# EAGLE board cansat (EAGLE 8.0.2)
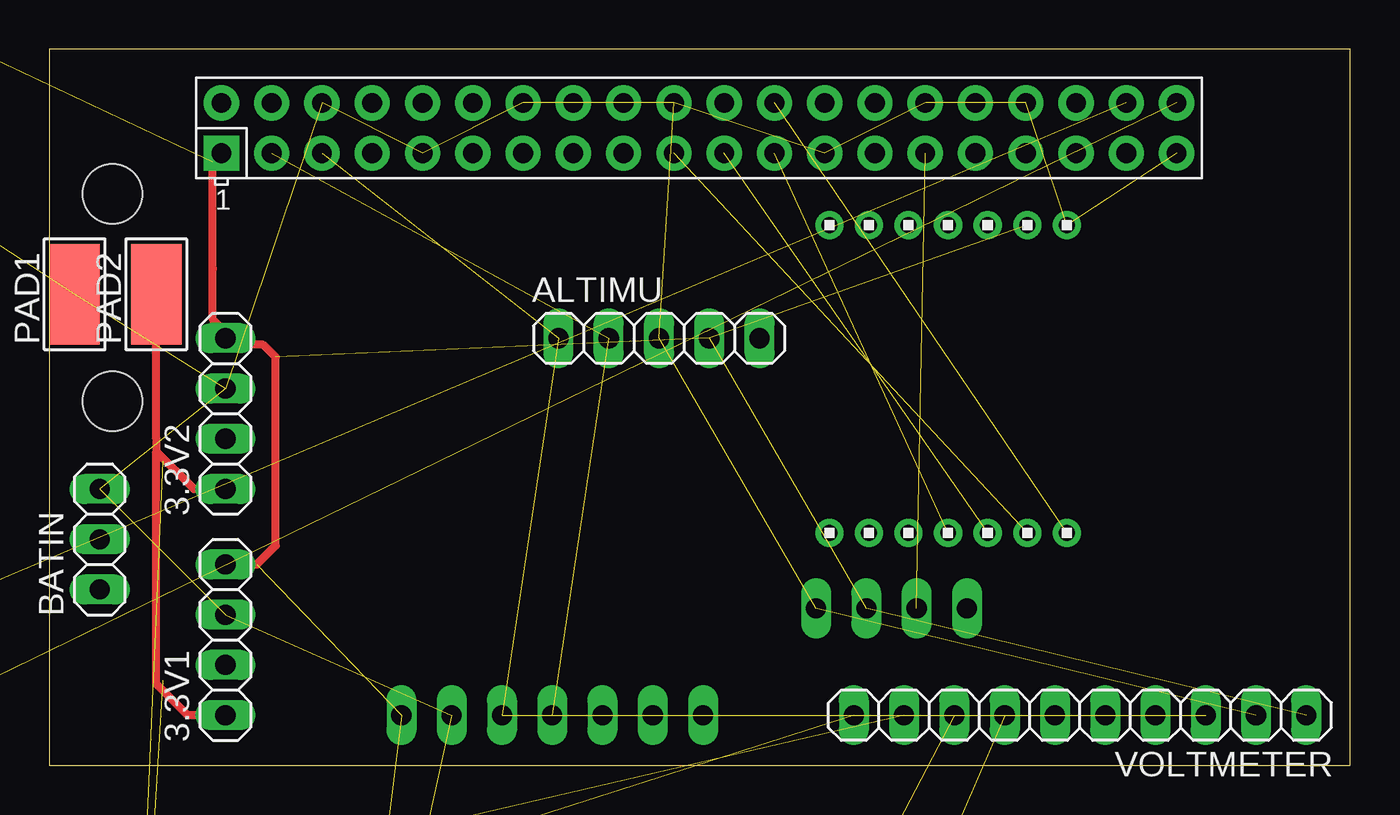
[diagram p0: board, top side]
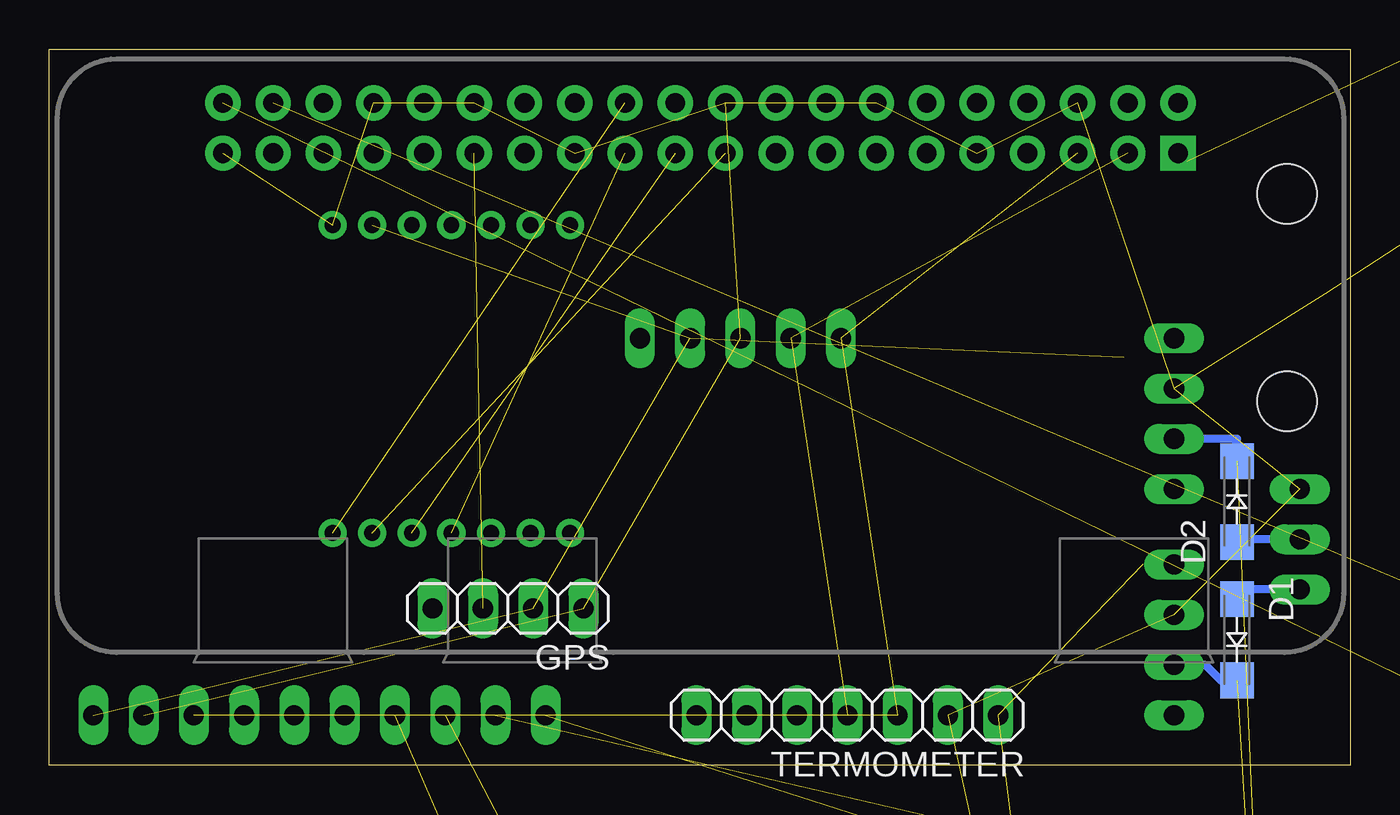
[diagram p1: board, bottom side, seen from below]

Size 65.71 x 36.19 mm. Coordinates in mm from the lower left corner, seen from the top.
Outline: 0,0 65.71,0 65.71,36.19 0,36.19 0,0
Copper layers (1*16): Top 0.035mm / dielectric 1.5mm / Bottom 0.035mm
Design rules "default": minimum track width 10mil, minimum drill 24mil, track to track 8mil, track to pad 8mil, pad to pad 8mil, via to via 8mil, smd to smd 8mil, copper to edge 40mil, drill to drill 8mil, minimum pad ring 10mil, minimum via ring 8mil, stop-mask expansion 4mil, vias tented up to drill 0mil, thermal gap 10mil
Holes 3 mm at 3.17,18.41 3.17,28.89

## Footprints (pad centres in the part's own frame; a part is rotated, then mirrored left to right if it is on the bottom)
1X04 = drill 1.016 long: 1 -3.81,0; 2 -1.27,0; 3 1.27,0; 4 3.81,0
1X05 = drill 1.016 long: 1 -5.08,0; 2 -2.54,0; 3 0,0; 4 2.54,0; 5 5.08,0
1X03 = drill 1.016 long: 1 -2.54,0; 2 0,0; 3 2.54,0
C1206 = smd 1.6 x 1.8: 1 -1.4,0; 2 1.4,0
SMA-DO214AC = smd 1.8 x 1.7: A -2.05,0; K 2.05,0
5-2,5 = smd 2.54 x 5.08: 1 0,0
R1206 = smd 1.6 x 1.803: 1 -1.422,0; 2 1.422,0
1X7 = drill 0.8 pad 1.422: 1 -6,0; 2 -4,0; 3 -2,0; 4 0,0; 5 2,0; 6 4,0; 7 6,0
RASPBERRYPI_BASTELSTUBE_V13_RASPI_BOARD_B+_FULL = drill 1 pad 1.778 square: 1 8.37,25.23 | drill 1 pad 1.778: 2 8.37,27.77; 3 10.91,25.23; 4 10.91,27.77; 5 13.45,25.23; 6 13.45,27.77; 7 15.99,25.23; 8 15.99,27.77; 9 18.53,25.23; 10 18.53,27.77; 11 21.07,25.23; 12 21.07,27.77; 13 23.61,25.23; 14 23.61,27.77; 15 26.15,25.23; 16 26.15,27.77; 17 28.69,25.23; 18 28.69,27.77; 19 31.23,25.23; 20 31.23,27.77; 21 33.77,25.23; 22 33.77,27.77; 23 36.31,25.23; 24 36.31,27.77; 25 38.85,25.23; 26 38.85,27.77; 27 41.39,25.23; 28 41.39,27.77; 29 43.93,25.23; 30 43.93,27.77; 31 46.47,25.23; 32 46.47,27.77; 33 49.01,25.23; 34 49.01,27.77; 35 51.55,25.23; 36 51.55,27.77; 37 54.09,25.23; 38 54.09,27.77; 39 56.63,25.23; 40 56.63,27.77
SJ_2W = smd 1.27 x 2.54: 1 -2.54,0; 2 0,0; 3 2.54,0
1X07 = drill 1.016 long: 1 -7.62,0; 2 -5.08,0; 3 -2.54,0; 4 0,0; 5 2.54,0; 6 5.08,0; 7 7.62,0
1X10 = drill 1.016 long: 1 -11.43,0; 2 -8.89,0; 3 -6.35,0; 4 -3.81,0; 5 -1.27,0; 6 1.27,0; 7 3.81,0; 8 6.35,0; 9 8.89,0; 10 11.43,0

## Placement (x,y rotation side)
3.3V1  [1X04]  8.89,6.35 90 top
3.3V2  [1X04]  8.89,17.78 90 top
ALTIMU  [1X05]  30.8,21.59 0 top
BATIN  [1X03]  2.54,11.43 90 top
C1  [C1206]  -1.4,-140.97 0 top  (outside the outline)
C2  [C1206]  -1.4,-204.47 0 top  (outside the outline)
C3  [C1206]  -1.4,-191.77 0 top  (outside the outline)
C4  [C1206]  -1.4,-179.07 0 top  (outside the outline)
C5  [C1206]  -1.4,-166.37 0 top  (outside the outline)
C6  [C1206]  -1.4,-153.67 0 top  (outside the outline)
D1  GF1  [SMA-DO214AC]  5.71,6.35 270 bottom
D2  GF1  [SMA-DO214AC]  5.71,13.34 90 bottom
ENCODER  [1X04]  -30.48,46.99 0 top  (outside the outline)
GPS  [1X04]  42.55,7.94 180 bottom
PAD1  [5-2,5]  1.27,23.81 0 top
PAD2  [5-2,5]  5.4,23.81 0 top
R1  10k  [R1206]  -1.42,-90.17 0 top  (outside the outline)
R2  10k  [R1206]  -1.42,-102.87 0 top  (outside the outline)
R3  10k  [R1206]  -1.42,-115.57 0 top  (outside the outline)
R4  10k  [R1206]  -1.42,-128.27 0 top  (outside the outline)
RADIOL  1X7  [1X7]  45.4,11.75 180 top
RADIOR  1X7  [1X7]  45.4,27.3 180 top
RASPIZERO  RPI-ZERO  [RASPBERRYPI_BASTELSTUBE_V13_RASPI_BOARD_B+_FULL]  0.32,5.71 0 top
SJ1  [SJ_2W]  -85.09,-26.67 0 top  (outside the outline)
SJ2  [SJ_2W]  -85.09,-36.83 0 top  (outside the outline)
TERMOMETER  [1X07]  25.4,2.54 180 bottom
VOLTMETER  [1X10]  52.07,2.54 180 top

## Library data of the parts
3.3V1 3.3V2 ALTIMU BATIN ENCODER GPS TERMOMETER VOLTMETER = pinhead
C1-C6 = eagle-ltspice; SPICEMODEL: NONE; SPICEPREFIX: C
D1 D2 = diode
PAD1 PAD2 = wirepad
R1-R4 = eagle-ltspice; SPICEMODEL: NONE; SPICEPREFIX: R
RADIOL RADIOR = headers(2mm)
RASPIZERO = RPI-Zero
SJ1 SJ2 = jumper

## Nets
3.3V: 3.3V1.4 3.3V2.4 ALTIMU.4 C1.2 C2.2 C3.2 C4.1 C5.2 C6.1 ENCODER.4 GPS.2 RADIOR.2 RASPIZERO.1 TERMOMETER.1 VOLTMETER.1
BAT1+: 3.3V1.2 D1.K R1.2
BAT2+: 3.3V2.2 D2.K R3.2
ENCODER1: ENCODER.2 SJ1.2
ENCODER1_ADC: SJ1.3 VOLTMETER.9
ENCODER1_DIR: RASPIZERO.38 SJ1.1
ENCODER2: ENCODER.3 SJ2.2
ENCODER2_ADC: SJ2.3 VOLTMETER.10
ENCODER2_DIR: RASPIZERO.40 SJ2.1
EX1: RASPIZERO.33
EX2: RASPIZERO.12
EX3: RASPIZERO.16
EX4: RASPIZERO.18
GND: 3.3V1.3 3.3V2.3 ALTIMU.3 BATIN.3 C1.1 C2.1 C3.1 C4.2 C5.1 C6.2 ENCODER.1 GPS.1 PAD1.1 R2.1 R4.1 RADIOR.1 RASPIZERO.6 RASPIZERO.9 RASPIZERO.14 RASPIZERO.20 RASPIZERO.25 RASPIZERO.30 RASPIZERO.34 RASPIZERO.39 TERMOMETER.2 VOLTMETER.2
GPSTX: GPS.3 RASPIZERO.29
MISO: RADIOL.3 RASPIZERO.21
MOSI: RADIOL.2 RASPIZERO.19
N$1: R1.1 R2.2 VOLTMETER.8
N$9: R3.1 R4.2 VOLTMETER.7
N$10: BATIN.1 D1.A
N$11: BATIN.2 D2.A
R_INT: RADIOR.3
RS: RADIOL.1 RASPIZERO.24
RX: RASPIZERO.10
SCL: ALTIMU.1 RASPIZERO.5 TERMOMETER.3 VOLTMETER.3
SCLK: RADIOL.4 RASPIZERO.23
SDA: ALTIMU.2 RASPIZERO.3 TERMOMETER.4 VOLTMETER.4
SHDN: 3.3V1.1 3.3V2.1 PAD2.1
SS: RASPIZERO.26
TX: RASPIZERO.8

## Tracks (layer width: path | path; a pad name or v marks a point on that pad's centre or on a via)
3.3V  (12 unrouted)
  Top 0.406: 8.26,25.08 8.26,22.54 8.89,21.91 3.3V2.4 9.21,21.27 10.79,21.27 11.43,20.64 11.43,11.11 10.48,10.16 3.3V1.4 | 8.26,25.08 8.26,25.11 | 8.26,25.08 8.26,30.51 RASPIZERO.1
BAT1+  (1 unrouted)
  Bottom 0.406: D1.K 6.52,4.3 7.3,5.08 3.3V1.2
BAT2+  (1 unrouted)
  Bottom 0.406: D2.K 5.71,16.51 3.3V2.2
ENCODER1  (1 unrouted)
ENCODER1_ADC  (1 unrouted)
ENCODER1_DIR  (1 unrouted)
ENCODER2  (1 unrouted)
ENCODER2_ADC  (1 unrouted)
ENCODER2_DIR  (1 unrouted)
GND  (25 unrouted)
GPSTX  (1 unrouted)
MISO  (1 unrouted)
MOSI  (1 unrouted)
N$1  (2 unrouted)
N$9  (2 unrouted)
N$10
  Bottom 0.406: BATIN.1 5.71,8.89 D1.A
N$11
  Bottom 0.406: BATIN.2 5.71,11.43 D2.A
RS  (1 unrouted)
SCL  (3 unrouted)
SCLK  (1 unrouted)
SDA  (3 unrouted)
SHDN
  Top 0.406: 3.3V2.1 7.3,13.97 5.4,15.88 | 5.4,15.88 5.4,16.51 PAD2.1 | 3.3V1.1 6.99,2.54 5.4,4.13 5.4,15.88